# EAGLE board BOARD (EAGLE 9.5.2)
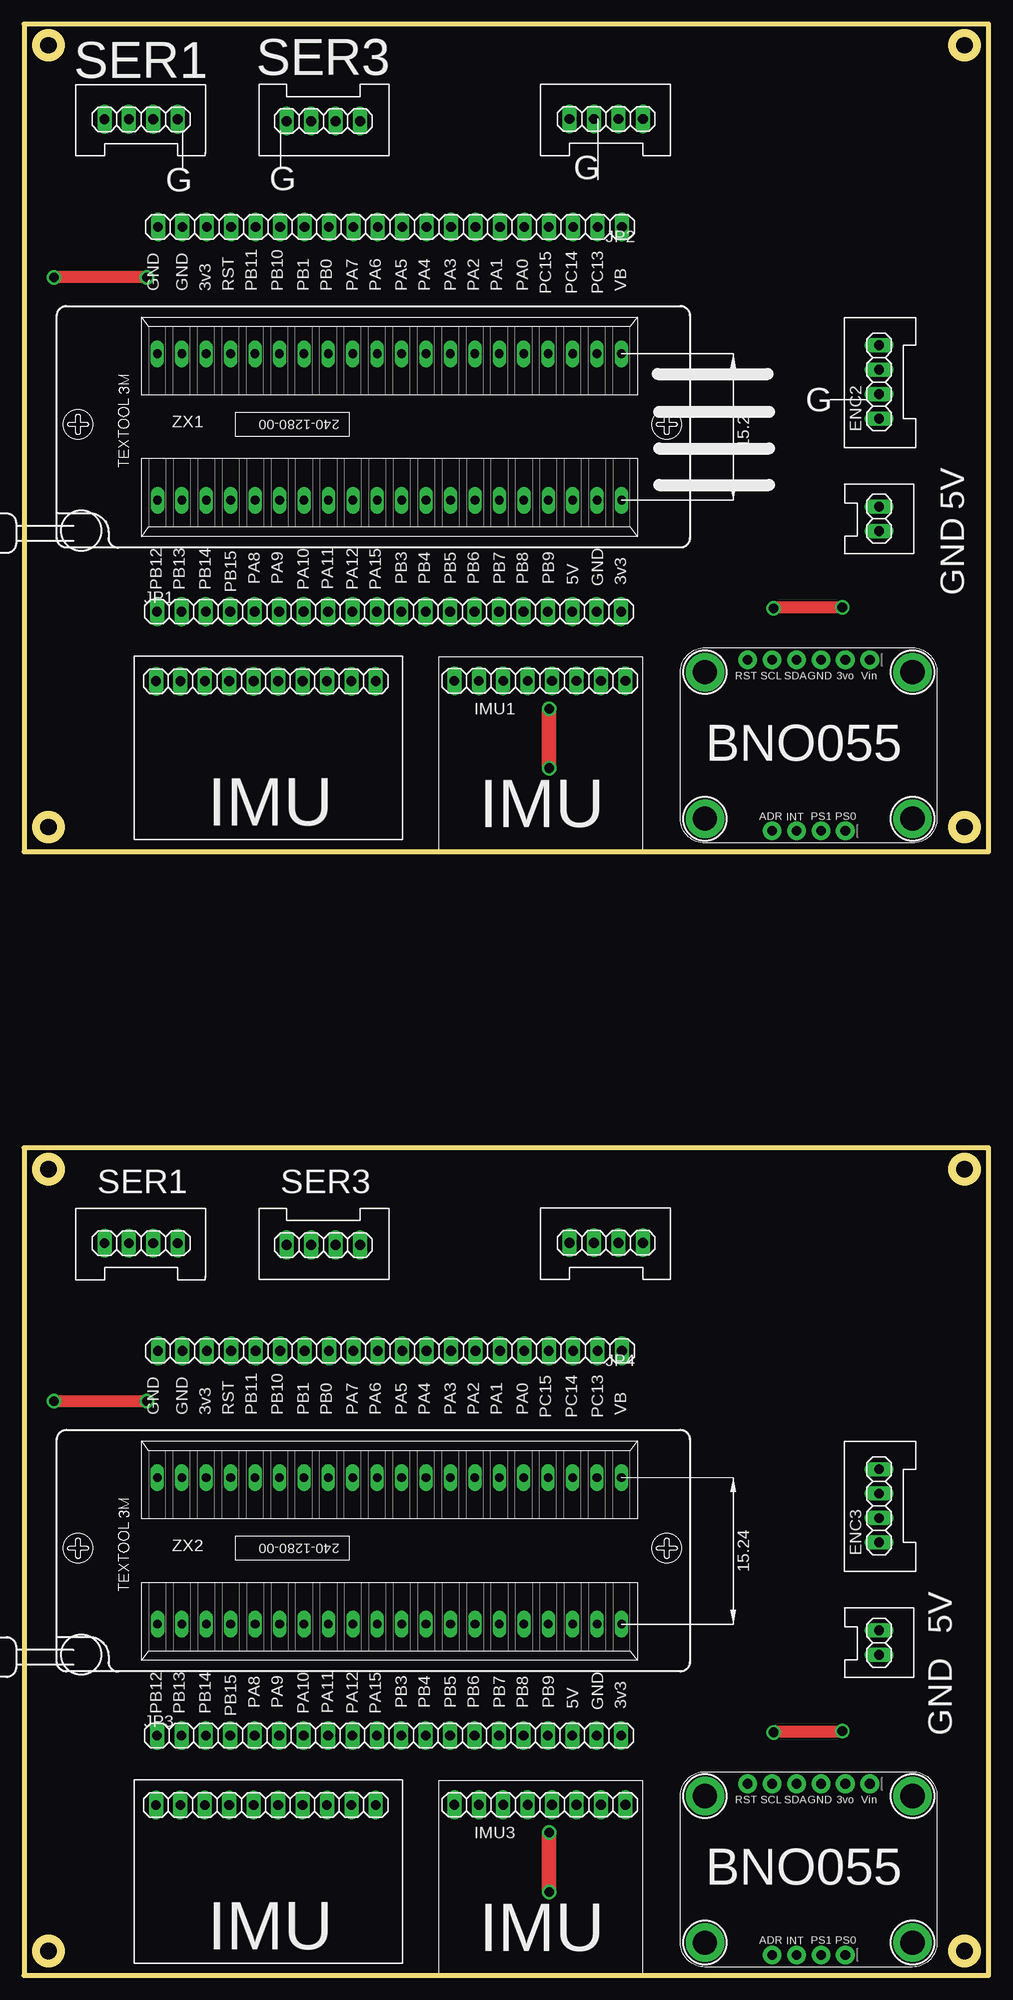
[diagram p0: board, top side]
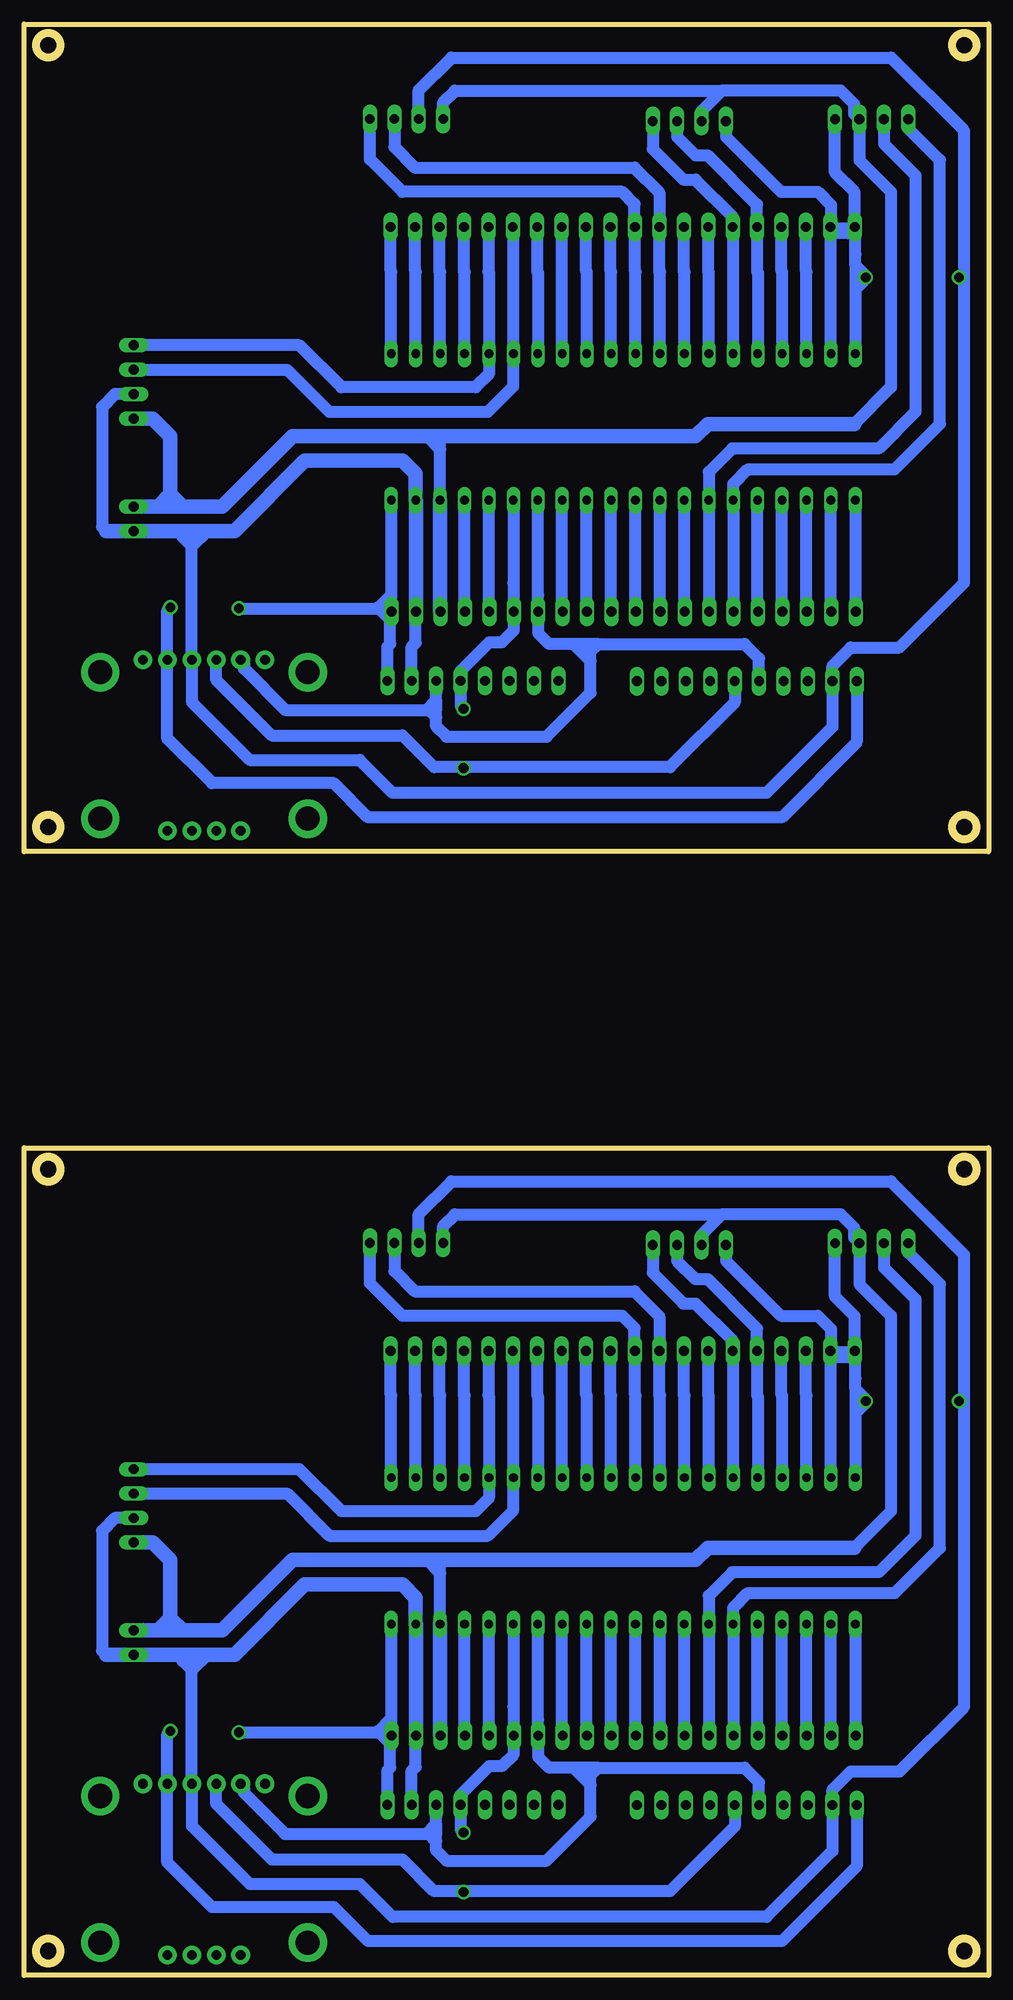
[diagram p1: board, bottom side, seen from below]

Size 100.31 x 202.87 mm. Coordinates in mm from the lower left corner, seen from the top.
Outline: 0,116.84 100.31,116.84 100.31,202.87 0,202.87 0,116.84
Outline: 0,0 100.31,0 100.31,86.03 0,86.03 0,0
Outline: circle at 2.54,200.66 radius 1.27
Outline: circle at 97.79,200.66 radius 1.27
Outline: circle at 97.79,119.38 radius 1.27
Outline: circle at 2.54,119.38 radius 1.27
Outline: circle at 2.54,83.82 radius 1.27
Outline: circle at 97.79,83.82 radius 1.27
Outline: circle at 97.79,2.54 radius 1.27
Outline: circle at 2.54,2.54 radius 1.27
Copper layers (1*16): Top 0.035mm / dielectric 1.5mm / Bottom 0.035mm
Design rules "default": minimum track width 6mil, minimum drill 0.35mm, track to track 6mil, track to pad 6mil, pad to pad 6mil, via to via 6mil, smd to smd 6mil, copper to edge 40mil, drill to drill 6mil, minimum pad ring 10mil, minimum via ring 8mil, stop-mask expansion 4mil, vias tented up to drill 0mil, thermal gap 10mil
Holes 3 mm at 2.54,200.66 97.79,200.66 97.79,119.38 2.54,119.38

## Footprints (pad centres in the part's own frame; a part is rotated, then mirrored left to right if it is on the bottom)
1X04_DATA = drill 1.016 long: 1 -3.81,0; 2 -1.27,0; 3 1.27,0; 4 3.81,0
IMU_GY521 = drill 1.016 long: ADO -6.35,0; GND 6.35,0; INT -8.89,0; SCL 3.81,0; SDA 1.27,0; VCC 8.89,0; XCL -3.81,0; XDA -1.27,0
1X10 = drill 1.016 long: 1 -11.43,0; 2 -8.89,0; 3 -6.35,0; 4 -3.81,0; 5 -1.27,0; 6 1.27,0; 7 3.81,0; 8 6.35,0; 9 8.89,0; 10 11.43,0
1X20 = drill 1.016 long: 1 -24.13,0; 2 -21.59,0; 3 -19.05,0; 4 -16.51,0; 5 -13.97,0; 6 -11.43,0; 7 -8.89,0; 8 -6.35,0; 9 -3.81,0; 10 -1.27,0; 11 1.27,0; 12 3.81,0; 13 6.35,0; 14 8.89,0; 15 11.43,0; 16 13.97,0; 17 16.51,0; 18 19.05,0; 19 21.59,0; 20 24.13,0
1X06_ROUND_76 = drill 1 pad 1.93: 1 -6.35,0; 2 -3.81,0; 3 -1.27,0; 4 1.27,0; 5 3.81,0; 6 6.35,0
1X04_ROUND_76 = drill 1 pad 1.93: 1 -3.81,0; 2 -1.27,0; 3 1.27,0; 4 3.81,0
MOUNTINGHOLE_2.5_PLATED_THICK = drill 2.5 pad 4: P$1 0,0
1X02_DATA = drill 1.016 long: 1 -1.27,0; 2 1.27,0
240-1280-00-0602J = drill 0.9 long: 1 -24.12,-8.88; 2 -21.58,-8.88; 3 -19.04,-8.88; 4 -16.5,-8.88; 5 -13.96,-8.88; 6 -11.42,-8.88; 7 -8.88,-8.88; 8 -6.34,-8.88; 9 -3.8,-8.88; 10 -1.26,-8.88; 11 1.28,-8.88; 12 3.82,-8.88; 13 6.36,-8.88; 14 8.9,-8.88; 15 11.44,-8.88; 16 13.98,-8.88; 17 16.52,-8.88; 18 19.06,-8.88; 19 21.6,-8.88; 20 24.14,-8.88; 21 24.13,6.35; 22 21.59,6.35; 23 19.05,6.35; 24 16.51,6.35; 25 13.97,6.35; 26 11.43,6.35; 27 8.89,6.35; 28 6.35,6.35; 29 3.81,6.35; 30 1.27,6.35; 31 -1.27,6.35; 32 -3.81,6.35; 33 -6.35,6.35; 34 -8.89,6.35; 35 -11.43,6.35; 36 -13.97,6.35; 37 -16.51,6.35; 38 -19.05,6.35; 39 -21.59,6.35; 40 -24.13,6.35

## Placement (x,y rotation side)
ENC1  ENC_Y  [1X04_DATA]  60.53,193 0 top
ENC2  ENC_X  [1X04_DATA]  88.92,165.66 90 top
ENC3  ENC_X  [1X04_DATA]  88.92,48.82 90 top
ENC4  ENC_Y  [1X04_DATA]  60.53,76.16 0 top
IMU1  IMU_ROBOCON_GY521  [IMU_GY521]  53.64,134.58 0 top
IMU2  [1X10]  25.14,134.56 0 top
IMU3  IMU_ROBOCON_GY521  [IMU_GY521]  53.64,17.74 0 top
IMU4  [1X10]  25.14,17.71 0 top
JP1  [1X20]  37.95,141.79 0 top
JP2  [1X20]  38.05,181.77 180 top
JP3  [1X20]  37.95,24.95 0 top
JP4  [1X20]  38.05,64.93 180 top
JP5  [1X06_ROUND_76]  81.6,136.76 180 top
JP6  [1X04_ROUND_76]  81.6,118.98 180 top
JP7  [1X06_ROUND_76]  81.6,19.92 180 top
JP8  [1X04_ROUND_76]  81.6,2.14 180 top
SER1  [1X04_DATA]  12.17,192.97 0 top
SER2  [1X04_DATA]  31.13,75.94 180 top
SER3  [1X04_DATA]  31.13,192.78 180 top
SER4  [1X04_DATA]  12.17,76.13 0 top
U$1  MOUNTINGHOLE2.5_THICK  [MOUNTINGHOLE_2.5_PLATED_THICK]  92.39,3.41 180 top
U$2  MOUNTINGHOLE2.5_THICK  [MOUNTINGHOLE_2.5_PLATED_THICK]  92.39,18.65 180 top
U$3  MOUNTINGHOLE2.5_THICK  [MOUNTINGHOLE_2.5_PLATED_THICK]  70.8,3.41 180 top
U$4  MOUNTINGHOLE2.5_THICK  [MOUNTINGHOLE_2.5_PLATED_THICK]  92.39,120.25 180 top
U$5  MOUNTINGHOLE2.5_THICK  [MOUNTINGHOLE_2.5_PLATED_THICK]  92.39,135.49 180 top
U$6  MOUNTINGHOLE2.5_THICK  [MOUNTINGHOLE_2.5_PLATED_THICK]  70.8,120.25 180 top
U$7  MOUNTINGHOLE2.5_THICK  [MOUNTINGHOLE_2.5_PLATED_THICK]  70.8,135.49 180 top
U$8  MOUNTINGHOLE2.5_THICK  [MOUNTINGHOLE_2.5_PLATED_THICK]  70.8,18.65 180 top
VIN  [1X02_DATA]  88.92,151.44 270 top
VIN1  [1X02_DATA]  88.92,34.59 270 top
ZX1  ZIF_401280  [240-1280-00-0602J]  37.99,162.25 0 top
ZX2  ZIF_401280  [240-1280-00-0602J]  37.99,45.41 0 top

## Library data of the parts
ENC1-ENC4 IMU1 IMU3 JP1-JP4 SER1-SER4 VIN VIN1 ZX1 ZX2 = MIA_LIBRARY-2-2-2
IMU2 IMU4 = MIA-Training
JP5-JP8 = microbuilder
U$1-U$8 = microbuilder; BOM: EXCLUDE

## Nets
3V3@1: IMU1.VCC IMU2.1 JP1.20 JP5.2 ZX1.20
3V3@2: JP2.18 ZX1.38
3V3@3: IMU3.VCC IMU4.1 JP3.20 JP7.2 ZX2.20
3V3@4: JP4.18 ZX2.38
5V: ENC1.1 ENC2.1 JP1.18 SER1.3 SER3.3 VIN.1 ZX1.18
5V1: ENC3.1 ENC4.1 JP3.18 SER2.3 SER4.3 VIN1.1 ZX2.18
GND: ENC1.2 ENC2.2 IMU1.GND IMU2.2 JP1.19 JP2.19 JP2.20 JP5.3 SER1.4 SER3.4 VIN.2 ZX1.19 ZX1.39 ZX1.40
GND1: ENC3.2 ENC4.2 IMU3.GND IMU4.2 JP3.19 JP4.19 JP4.20 JP7.3 SER2.4 SER4.4 VIN1.2 ZX2.19 ZX2.39 ZX2.40
I2CADDR_3V: JP6.4
I2CADDR_3V1: JP8.4
INT_3V: JP6.3
INT_3V1: JP8.3
PA_0: ENC2.4 JP2.5 ZX1.25
PA_1: ENC2.3 JP2.6 ZX1.26
PA_2: JP2.7 ZX1.27
PA_3: JP2.8 ZX1.28
PA_4: JP2.9 ZX1.29
PA_5: JP2.10 ZX1.30
PA_6: ENC1.4 JP2.11 ZX1.31
PA_7: ENC1.3 JP2.12 ZX1.32
PA_8: JP1.5 ZX1.5
PA_9: JP1.6 SER1.1 ZX1.6
PA_10: JP1.7 SER1.2 ZX1.7
PA_11: JP1.8 ZX1.8
PA_12: JP1.9 ZX1.9
PA_13: JP3.5 ZX2.5
PA_14: JP3.6 SER4.1 ZX2.6
PA_15: JP1.10 ZX1.10
PA_16: JP3.7 SER4.2 ZX2.7
PA_17: JP3.8 ZX2.8
PA_18: JP3.9 ZX2.9
PA_19: JP3.10 ZX2.10
PA_20: ENC3.4 JP4.5 ZX2.25
PA_21: ENC3.3 JP4.6 ZX2.26
PA_22: JP4.7 ZX2.27
PA_23: JP4.8 ZX2.28
PA_24: JP4.9 ZX2.29
PA_25: JP4.10 ZX2.30
PA_26: ENC4.4 JP4.11 ZX2.31
PA_27: ENC4.3 JP4.12 ZX2.32
PB_0: JP2.13 ZX1.33
PB_1: JP2.14 ZX1.34
PB_2: JP3.1 ZX2.1
PB_3: JP1.11 ZX1.11
PB_4: JP1.12 ZX1.12
PB_5: JP1.13 ZX1.13
PB_6: IMU1.SCL IMU2.5 JP1.14 JP5.5 ZX1.14
PB_7: IMU1.SDA IMU2.6 JP1.15 JP5.4 ZX1.15
PB_8: JP1.16 ZX1.16
PB_9: JP1.17 ZX1.17
PB_10: JP2.15 SER3.1 ZX1.35
PB_11: JP2.16 SER3.2 ZX1.36
PB_12: JP1.1 ZX1.1
PB_13: JP1.2 ZX1.2
PB_14: JP1.3 ZX1.3
PB_15: JP1.4 ZX1.4
PB_16: JP3.2 ZX2.2
PB_17: JP3.3 ZX2.3
PB_18: JP3.4 ZX2.4
PB_19: JP3.11 ZX2.11
PB_20: JP3.12 ZX2.12
PB_21: JP3.13 ZX2.13
PB_22: IMU3.SCL IMU4.5 JP3.14 JP7.5 ZX2.14
PB_23: IMU3.SDA IMU4.6 JP3.15 JP7.4 ZX2.15
PB_24: JP3.16 ZX2.16
PB_25: JP3.17 ZX2.17
PB_26: JP4.13 ZX2.33
PB_27: JP4.14 ZX2.34
PB_28: JP4.15 SER2.1 ZX2.35
PB_29: JP4.16 SER2.2 ZX2.36
PC_1: JP4.2 ZX2.22
PC_2: JP4.3 ZX2.23
PC_3: JP4.4 ZX2.24
PC_13: JP2.2 ZX1.22
PC_14: JP2.3 ZX1.23
PC_15: JP2.4 ZX1.24
PS0_3V: JP6.1
PS0_3V1: JP8.1
PS1_3V: JP6.2
PS1_3V1: JP8.2
RESET: JP2.17 ZX1.37
RESET1: JP4.17 ZX2.37
VB: JP2.1 ZX1.21
VB1: JP4.1 ZX2.21

## Tracks (layer width: path | path; a pad name or v marks a point on that pad's centre or on a via)
3V3@1  (via drill 1)
  Top 1.27: v77.96,142.11 78.09,142.24 v85.09,142.24
  Bottom 1.27: ZX1.20 62.13,143.51 | 62.13,143.51 62.13,142.24 | 62.13,142.24 62.13,141.83 JP1.20 | JP1.20 62.23,141.64 62.23,140.97 | IMU1.VCC 62.53,138.13 62.23,138.43 62.23,140.97 | IMU2.1 13.71,128.2 21.52,120.4 64.52,120.4 68.07,123.95 80.77,123.95 85.41,128.59 JP5.2 85.41,141.92 v85.09,142.24 | v77.96,142.11 63.37,142.11 | 62.54,142.24 62.13,142.24 | JP1.20 62.54,142.24 | 62.54,142.24 63.4,142.24 | 63.37,142.11 63.5,142.24 63.4,142.24 | 63.37,142.11 62.23,140.97 | 63.4,142.24 62.13,143.51
3V3@2
  Bottom 1.27: ZX1.38 18.94,177.11 19,177.17 JP2.18
3V3@3  (via drill 1)
  Top 1.27: v77.96,25.27 78.09,25.4 v85.09,25.4
  Bottom 1.27: ZX2.20 62.13,26.67 | 62.13,26.67 62.13,25.4 | 62.13,25.4 62.13,24.99 JP3.20 | JP3.20 62.23,24.8 62.23,24.13 | IMU3.VCC 62.53,21.29 62.23,21.59 62.23,24.13 | IMU4.1 13.71,11.36 21.52,3.56 64.52,3.56 68.07,7.11 80.77,7.11 85.41,11.75 JP7.2 85.41,25.08 v85.09,25.4 | v77.96,25.27 63.37,25.27 | 62.54,25.4 62.13,25.4 | JP3.20 62.54,25.4 | 62.54,25.4 63.4,25.4 | 63.37,25.27 63.5,25.4 63.4,25.4 | 63.37,25.27 62.23,24.13 | 63.4,25.4 62.13,26.67
3V3@4
  Bottom 1.27: ZX2.38 18.94,60.27 19,60.33 JP4.18
5V  (via drill 1)
  Bottom 1.27: SER1.3 13.48,193.01 | SER3.3 29.86,193.83 27.72,195.96 | SER1.3 13.98,193.51 13.98,194.56 15.39,195.96 27.72,195.96 | ENC1.1 56.73,194.74 55.5,195.96 27.72,195.96 | 13.97,161.29 10.16,165.1 10.16,185.42 13.44,188.7 SER1.3 | ZX1.18 57.05,158.65 | 58.42,160.02 57.05,158.65 | 57.05,158.65 57.05,159.92 57.15,160.02
  Bottom 1.5: 83.82,152.7 79.7,152.7 72.39,160.02 58.42,160.02 57.15,160.02 30.48,160.02 29.21,161.29 13.97,161.29 | ZX1.18 57.05,141.83 JP1.18 | 85.09,153.97 85.09,160.02 86.92,161.85 ENC2.1 | 85.09,153.97 83.82,152.7 | 83.82,152.7 86.36,152.7 | 85.09,153.97 86.36,152.7 | 86.36,152.7 VIN.1
  other vias: 29.86,192.78
5V1  (via drill 1)
  Bottom 1.27: SER4.3 13.48,76.17 | SER2.3 29.86,76.99 27.72,79.12 | SER4.3 13.98,76.67 13.98,77.72 15.39,79.12 27.72,79.12 | ENC4.1 56.73,77.89 55.5,79.12 27.72,79.12 | 13.97,44.45 10.16,48.26 10.16,68.58 13.44,71.86 SER4.3 | ZX2.18 57.05,41.81 | 58.42,43.18 57.05,41.81 | 57.05,41.81 57.05,43.08 57.15,43.18
  Bottom 1.5: 83.82,35.86 79.7,35.86 72.39,43.18 58.42,43.18 57.15,43.18 30.48,43.18 29.21,44.45 13.97,44.45 | ZX2.18 57.05,24.99 JP3.18 | 85.09,37.13 85.09,43.18 86.92,45.01 ENC3.1 | 85.09,37.13 83.82,35.86 | 83.82,35.86 86.36,35.86 | 85.09,37.13 86.36,35.86 | 86.36,35.86 VIN1.1
  other vias: 29.86,75.94
GND  (via drill 1)
  Top 1.27: v12.78,176.53 v3.1,176.53
  Bottom 1.27: 13.86,177.8 13.86,176.53 | 13.86,176.53 13.86,175.26 | 13.86,175.26 ZX1.40 | ZX1.19 59.59,141.74 | 59.59,141.07 59.69,140.97 59.69,141.64 JP1.19 59.59,141.74 | ZX1.39 16.4,181.1 | 16.4,181.1 16.4,181.61 | IMU1.GND 59.99,138.13 59.59,138.53 59.59,141.07 | 82.55,150.16 82.87,149.85 82.87,148.59 | 82.87,148.59 JP5.3 82.87,132.4 76.83,126.36 65.41,126.36 61.98,122.94 23.11,122.94 16.25,129.79 IMU2.2 16.25,136.14 14.35,138.05 9.27,138.05 2.54,144.78 2.54,175.97 | 27.32,192.29 SER3.4 27.32,191.15 21.59,185.42 17.78,185.42 16.4,184.04 16.4,181.7 | 15.98,192.93 SER1.4 15.98,187.43 13.93,185.38 JP2.20 | v12.78,176.53 13.86,176.53 | 2.54,175.97 v3.1,176.53 | v12.78,176.53 12.78,176.72 13.86,177.8 | v12.78,176.53 12.78,176.34 13.86,175.26 | JP2.20 14.09,181.61 16.4,181.61 | 16.4,181.7 JP2.19 16.51,181.81 | 16.4,181.7 16.4,181.61 | 59.59,141.74 59.59,141.07 | 13.86,177.8 13.86,178.93 13.84,178.94 13.84,181.69 JP2.20 | JP2.20 14.59,181.1 16.4,181.1 | 82.87,148.59 83.82,149.54 83.82,150.16 | 82.87,148.59 82.86,148.59 81.28,150.16 | 87.63,150.16 VIN.2 91.75,150.16 92.2,150.62 92.2,163.07 90.88,164.39 ENC2.2 | 2.54,175.97 2.54,191.77 10.16,199.39 55.88,199.39 59.27,196 ENC1.2
  Bottom 1.5: JP1.19 59.55,153.32 ZX1.19 59.59,156.11 60.96,157.48 71.12,157.48 78.44,150.16 81.28,150.16 82.55,150.16 83.18,150.16 | 82.87,149.85 83.18,150.16 | 83.18,150.16 83.82,150.16 87.63,150.16 91.75,150.16
GND1  (via drill 1)
  Top 1.27: v12.78,59.69 v3.1,59.69
  Bottom 1.27: 13.86,60.96 13.86,59.69 | 13.86,59.69 13.86,58.42 | 13.86,58.42 ZX2.40 | ZX2.19 59.59,24.9 | 59.59,24.23 59.69,24.13 59.69,24.8 JP3.19 59.59,24.9 | ZX2.39 16.4,64.26 | 16.4,64.26 16.4,64.77 | IMU3.GND 59.99,21.29 59.59,21.69 59.59,24.23 | 82.55,33.32 82.87,33.01 82.87,31.75 | 82.87,31.75 JP7.3 82.87,15.56 76.83,9.52 65.41,9.52 61.98,6.1 23.11,6.1 16.25,12.95 IMU4.2 16.25,19.3 14.35,21.21 9.27,21.21 2.54,27.94 2.54,59.13 | 27.32,75.45 SER2.4 27.32,74.31 21.59,68.58 17.78,68.58 16.4,67.2 16.4,64.86 | 15.98,76.09 SER4.4 15.98,70.59 13.93,68.53 JP4.20 | v12.78,59.69 13.86,59.69 | 2.54,59.13 v3.1,59.69 | v12.78,59.69 12.78,59.88 13.86,60.96 | v12.78,59.69 12.78,59.5 13.86,58.42 | JP4.20 14.09,64.77 16.4,64.77 | 16.4,64.86 JP4.19 16.51,64.97 | 16.4,64.86 16.4,64.77 | 59.59,24.9 59.59,24.23 | 13.86,60.96 13.86,62.09 13.84,62.1 13.84,64.85 JP4.20 | JP4.20 14.59,64.26 16.4,64.26 | 82.87,31.75 83.82,32.7 83.82,33.32 | 82.87,31.75 82.86,31.75 81.28,33.32 | 87.63,33.32 VIN1.2 91.75,33.32 92.2,33.78 92.2,46.23 90.88,47.55 ENC3.2 | 2.54,59.13 2.54,74.93 10.16,82.55 55.88,82.55 59.27,79.16 ENC4.2
  Bottom 1.5: JP3.19 59.55,36.48 ZX2.19 59.59,39.27 60.96,40.64 71.12,40.64 78.44,33.32 81.28,33.32 82.55,33.32 83.18,33.32 | 82.87,33.01 83.18,33.32 | 83.18,33.32 83.82,33.32 87.63,33.32 91.75,33.32
PA_0
  Bottom 1.27: JP2.5 52.02,177.17 51.96,177.11 ZX1.25 51.96,166.48 53.34,165.1 67.31,165.1 71.69,169.47 ENC2.4
PA_1
  Bottom 1.27: JP2.6 49.42,181.7 ZX1.26 49.42,165.21 52.07,162.56 68.58,162.56 72.95,166.94 ENC2.3
PA_2
  Bottom 1.27: ZX1.27 46.88,177.11 46.95,177.17 JP2.7 46.99,181.81
PA_3
  Bottom 1.27: JP2.8 44.41,168.66 ZX1.28
PA_4
  Bottom 1.27: ZX1.29 41.8,177.11 41.87,177.17 JP2.9
PA_5
  Bottom 1.27: ZX1.30 39.26,177.11 39.33,177.17 JP2.10
PA_6
  Bottom 1.27: ZX1.31 36.72,177.11 36.78,177.17 JP2.11 36.83,181.81 36.83,184.15 38.1,185.42 60.96,185.42 64.34,188.81 ENC1.4
PA_7
  Bottom 1.27: ZX1.32 34.18,177.11 34.24,177.17 JP2.12 34.24,185.38 36.83,187.96 59.69,187.96 61.8,190.07 ENC1.3
PA_8
  Bottom 1.27: ZX1.5 24.03,141.74 JP1.5
PA_9
  Bottom 1.27: 8.51,192.82 SER1.1 8.36,192 5.08,188.72 5.08,161.29 9.78,156.59 25.02,156.59 26.57,155.04 ZX1.6 26.57,141.74 JP1.6
PA_10
  Bottom 1.27: JP1.7 29.11,141.83 ZX1.7 29.11,156.31 26.67,158.75 11.43,158.75 7.62,162.56 7.62,187.15 10.9,190.43 SER1.2
PA_11
  Bottom 1.27: ZX1.8 31.65,141.74 JP1.8
PA_12
  Bottom 1.27: ZX1.9 34.19,141.74 JP1.9
PA_13
  Bottom 1.27: ZX2.5 24.03,24.9 JP3.5
PA_14
  Bottom 1.27: 8.51,75.98 SER4.1 8.36,75.16 5.08,71.88 5.08,44.45 9.78,39.75 25.02,39.75 26.57,38.2 ZX2.6 26.57,24.9 JP3.6
PA_15
  Bottom 1.27: ZX1.10 36.73,141.74 JP1.10
PA_16
  Bottom 1.27: JP3.7 29.11,24.99 ZX2.7 29.11,39.47 26.67,41.91 11.43,41.91 7.62,45.72 7.62,70.31 10.9,73.59 SER4.2
PA_17
  Bottom 1.27: ZX2.8 31.65,24.9 JP3.8
PA_18
  Bottom 1.27: ZX2.9 34.19,24.9 JP3.9
PA_19
  Bottom 1.27: ZX2.10 36.73,24.9 JP3.10
PA_20
  Bottom 1.27: JP4.5 52.02,60.33 51.96,60.27 ZX2.25 51.96,49.64 53.34,48.26 67.31,48.26 71.69,52.63 ENC3.4
PA_21
  Bottom 1.27: JP4.6 49.42,64.86 ZX2.26 49.42,48.37 52.07,45.72 68.58,45.72 72.95,50.09 ENC3.3
PA_22
  Bottom 1.27: ZX2.27 46.88,60.27 46.95,60.33 JP4.7 46.99,64.97
PA_23
  Bottom 1.27: JP4.8 44.41,51.82 ZX2.28
PA_24
  Bottom 1.27: ZX2.29 41.8,60.27 41.87,60.33 JP4.9
PA_25
  Bottom 1.27: ZX2.30 39.26,60.27 39.33,60.33 JP4.10
PA_26
  Bottom 1.27: ZX2.31 36.72,60.27 36.78,60.33 JP4.11 36.83,64.97 36.83,67.31 38.1,68.58 60.96,68.58 64.34,71.97 ENC4.4
PA_27
  Bottom 1.27: ZX2.32 34.18,60.27 34.24,60.33 JP4.12 34.24,68.53 36.83,71.12 59.69,71.12 61.8,73.23 ENC4.3
PB_0
  Bottom 1.27: ZX1.33 31.64,177.11 31.7,177.17 JP2.13
PB_1
  Bottom 1.27: ZX1.34 29.1,177.11 29.16,177.17 JP2.14
PB_2
  Bottom 1.27: ZX2.1 13.87,25.4 13.82,25.35 JP3.1
PB_3
  Bottom 1.27: ZX1.11 39.27,141.74 JP1.11
PB_4
  Bottom 1.27: ZX1.12 41.81,141.74 JP1.12
PB_5
  Bottom 1.27: ZX1.13 44.35,141.74 JP1.13
PB_6
  Bottom 1.27: ZX1.14 46.89,143.51 46.84,143.47 JP1.14 46.84,139.56 45.72,138.43 43.18,138.43 | IMU1.SCL 57.45,133.35 57.45,132.54 | 57.45,132.54 57.45,131.57 | 41.4,136.65 41.4,133.35 45.98,128.77 56.38,128.77 57.45,129.84 57.45,130.81 | 41.4,136.65 43.18,138.43 | JP5.5 77.45,136.42 77.45,135.85 73.16,131.57 58.42,131.57 | 58.21,131.57 57.45,131.57 | 40.64,138.43 25.4,138.43 23.88,136.91 IMU2.5 | 40.64,138.43 43.18,138.43 | 41.4,136.65 41.4,137.67 40.64,138.43 | 57.45,130.81 57.45,131.57 | 57.45,130.81 58.21,131.57 | 58.21,131.57 58.42,131.57 | 58.42,131.57 57.45,132.54
PB_7  (via drill 1)
  Top 1.5: v54.61,125.52 v54.61,131.7
  Bottom 1.27: ZX1.15 49.43,144.78 49.38,144.73 JP1.15 49.38,139.84 50.62,138.61 51.93,138.61 54.91,135.63 IMU1.SDA 54.91,132 v54.61,131.7 | JP5.4 80.33,134.68 74.55,128.91 60.96,128.91 57.66,125.6 54.7,125.6 | 54.61,125.63 v54.61,125.52 54.7,125.6 | IMU2.6 26.41,132.33 33.15,125.6 54.7,125.6
PB_8
  Bottom 1.27: ZX1.16 51.97,141.74 JP1.16
PB_9
  Bottom 1.27: ZX1.17 54.51,141.74 JP1.17
PB_10
  Bottom 1.27: ZX1.35 26.56,181.7 JP2.15 26.62,182.83 30.48,186.69 31.75,186.69 34.94,189.88 SER3.1
PB_11
  Bottom 1.27: ZX1.36 24.02,177.11 24.09,177.17 JP2.16 24.09,184.1 29.21,189.23 30.48,189.23 32.4,191.15 SER3.2
PB_12
  Bottom 1.27: ZX1.1 13.87,142.24 13.82,142.19 JP1.1
PB_13
  Bottom 1.27: ZX1.2 16.41,141.74 JP1.2
PB_14
  Bottom 1.27: ZX1.3 18.95,141.74 JP1.3
PB_15
  Bottom 1.27: ZX1.4 21.49,141.74 JP1.4
PB_16
  Bottom 1.27: ZX2.2 16.41,24.9 JP3.2
PB_17
  Bottom 1.27: ZX2.3 18.95,24.9 JP3.3
PB_18
  Bottom 1.27: ZX2.4 21.49,24.9 JP3.4
PB_19
  Bottom 1.27: ZX2.11 39.27,24.9 JP3.11
PB_20
  Bottom 1.27: ZX2.12 41.81,24.9 JP3.12
PB_21
  Bottom 1.27: ZX2.13 44.35,24.9 JP3.13
PB_22
  Bottom 1.27: ZX2.14 46.89,26.67 46.84,26.62 JP3.14 46.84,22.71 45.72,21.59 43.18,21.59 | IMU3.SCL 57.45,16.51 57.45,15.7 | 57.45,15.7 57.45,14.73 | 41.4,19.81 41.4,16.51 45.98,11.93 56.38,11.93 57.45,13 57.45,13.97 | 41.4,19.81 43.18,21.59 | JP7.5 77.45,19.58 77.45,19.01 73.16,14.73 58.42,14.73 | 58.21,14.73 57.45,14.73 | 40.64,21.59 25.4,21.59 23.88,20.06 IMU4.5 | 40.64,21.59 43.18,21.59 | 41.4,19.81 41.4,20.83 40.64,21.59 | 57.45,13.97 57.45,14.73 | 57.45,13.97 58.21,14.73 | 58.21,14.73 58.42,14.73 | 58.42,14.73 57.45,15.7
PB_23  (via drill 1)
  Top 1.5: v54.61,8.68 v54.61,14.86
  Bottom 1.27: ZX2.15 49.43,27.94 49.38,27.89 JP3.15 49.38,23 50.62,21.77 51.93,21.77 54.91,18.79 IMU3.SDA 54.91,15.16 v54.61,14.86 | JP7.4 80.33,17.84 74.55,12.06 60.96,12.06 57.66,8.76 54.7,8.76 | 54.61,8.79 v54.61,8.68 54.7,8.76 | IMU4.6 26.41,15.49 33.15,8.76 54.7,8.76
PB_24
  Bottom 1.27: ZX2.16 51.97,24.9 JP3.16
PB_25
  Bottom 1.27: ZX2.17 54.51,24.9 JP3.17
PB_26
  Bottom 1.27: ZX2.33 31.64,60.27 31.7,60.33 JP4.13
PB_27
  Bottom 1.27: ZX2.34 29.1,60.27 29.16,60.33 JP4.14
PB_28
  Bottom 1.27: ZX2.35 26.56,64.86 JP4.15 26.62,65.99 30.48,69.85 31.75,69.85 34.94,73.04 SER2.1
PB_29
  Bottom 1.27: ZX2.36 24.02,60.27 24.09,60.33 JP4.16 24.09,67.26 29.21,72.39 30.48,72.39 32.4,74.31 SER2.2
PC_1
  Bottom 1.27: ZX2.22 59.58,60.27 59.65,60.33 JP4.2
PC_2
  Bottom 1.27: ZX2.23 57.04,60.27 57.1,60.33 JP4.3
PC_3
  Bottom 1.27: ZX2.24 54.5,60.27 54.56,60.33 JP4.4
PC_13
  Bottom 1.27: ZX1.22 59.58,177.11 59.65,177.17 JP2.2
PC_14
  Bottom 1.27: ZX1.23 57.04,177.11 57.1,177.17 JP2.3
PC_15
  Bottom 1.27: ZX1.24 54.5,177.11 54.56,177.17 JP2.4
RESET
  Bottom 1.27: ZX1.37 21.48,177.11 21.55,177.17 JP2.17
RESET1
  Bottom 1.27: ZX2.37 21.48,60.27 21.55,60.33 JP4.17
VB
  Bottom 1.27: ZX1.21 62.12,177.11 62.19,177.17 JP2.1
VB1
  Bottom 1.27: ZX2.21 62.12,60.27 62.19,60.33 JP4.1

## Text on the board
tPlace: G | G | G | GND | GND | 3v3 | RST | PB11 | PB10 | PB1 | PB0 | PA7 | PA6 | PA5 | PA4 | PA3 | PA2 | PA1 | PA0 | VB | PC15 | PC14 | PC13 | G | 5V | PA8 | PA9 | PA11 | PB3 | PB4 | PB5 | PB6 | PB7 | PB8 | PB9 | 5V | GND | 3v3 | PB12 | PB13 | PB14 | PB15 | PA10 | PA12 | PA15 | GND | RST | SCL | SDA | GND | 3vo | Vin | BNO055 | ADR | INT | PS1 | PS0 | IMU | SER1 | SER3 | GND | GND | 3v3 | RST | PB11 | PB10 | PB1 | PB0 | PA7 | PA6 | PA5 | PA4 | PA3 | PA2 | PA1 | PA0 | VB | PC15 | PC14 | PC13 | 5V | GND | PB12 | PB13 | PB14 | PA8 | PA9 | PA10 | PA11 | PA12 | PA15 | PB3 | PB4 | PB5 | PB6 | PB7 | PB8 | PB9 | 5V | GND | 3v3 | PB15 | RST | SCL | SDA | GND | 3vo | Vin | BNO055 | ADR | INT | PS1 | PS0 | IMU